# EAGLE board Titan (EAGLE 9.6.2)
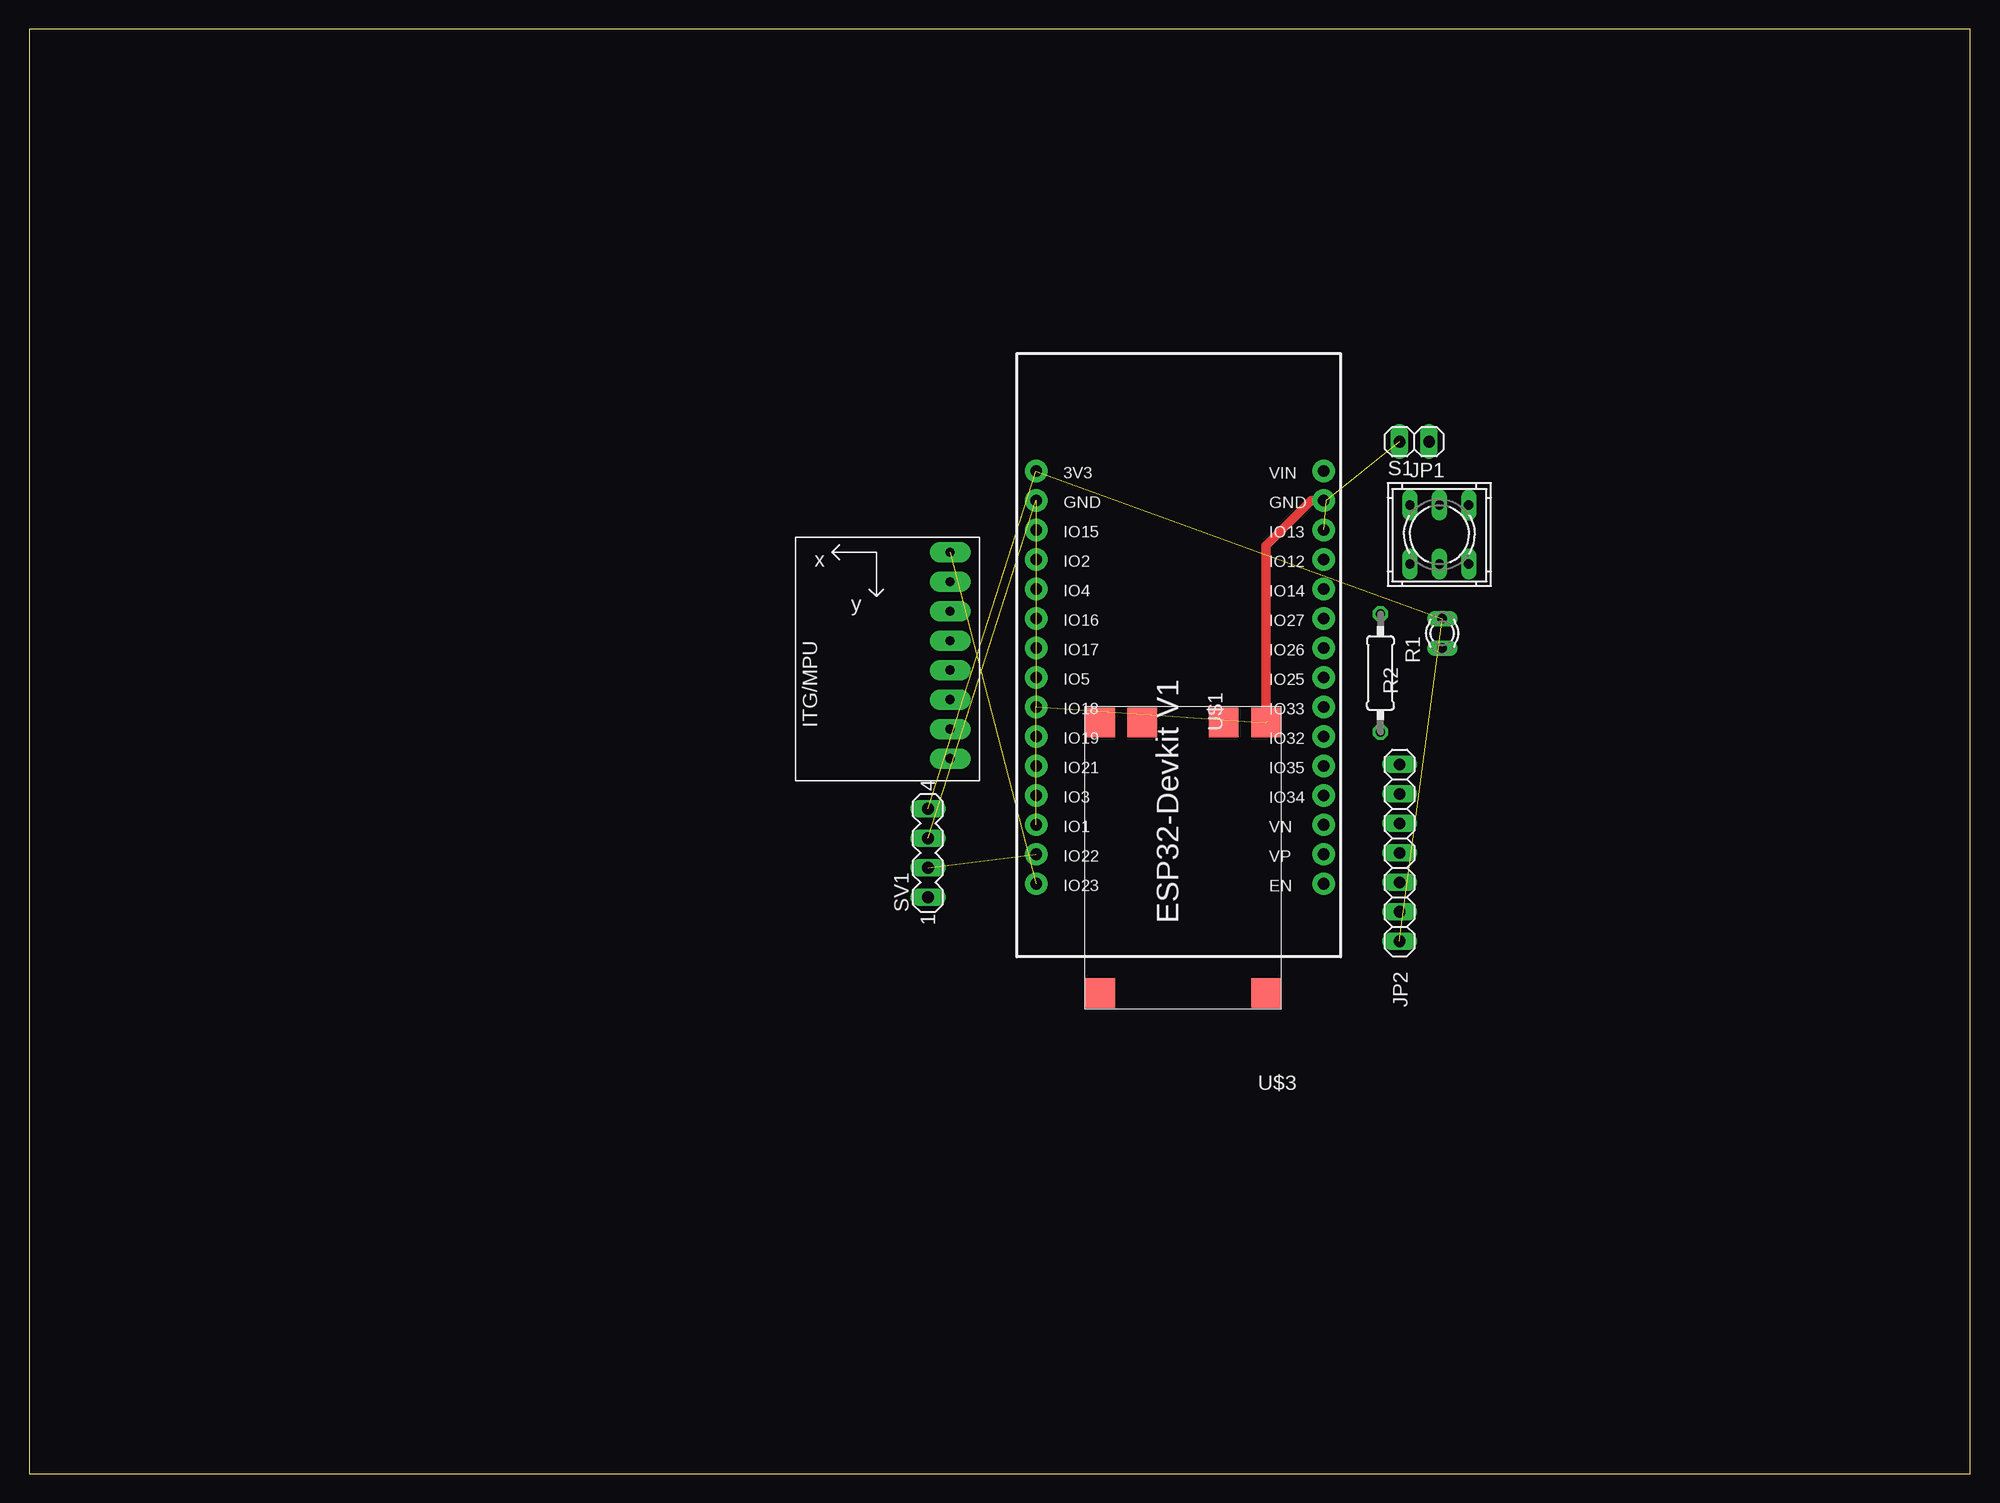
[diagram p0: board, top side]
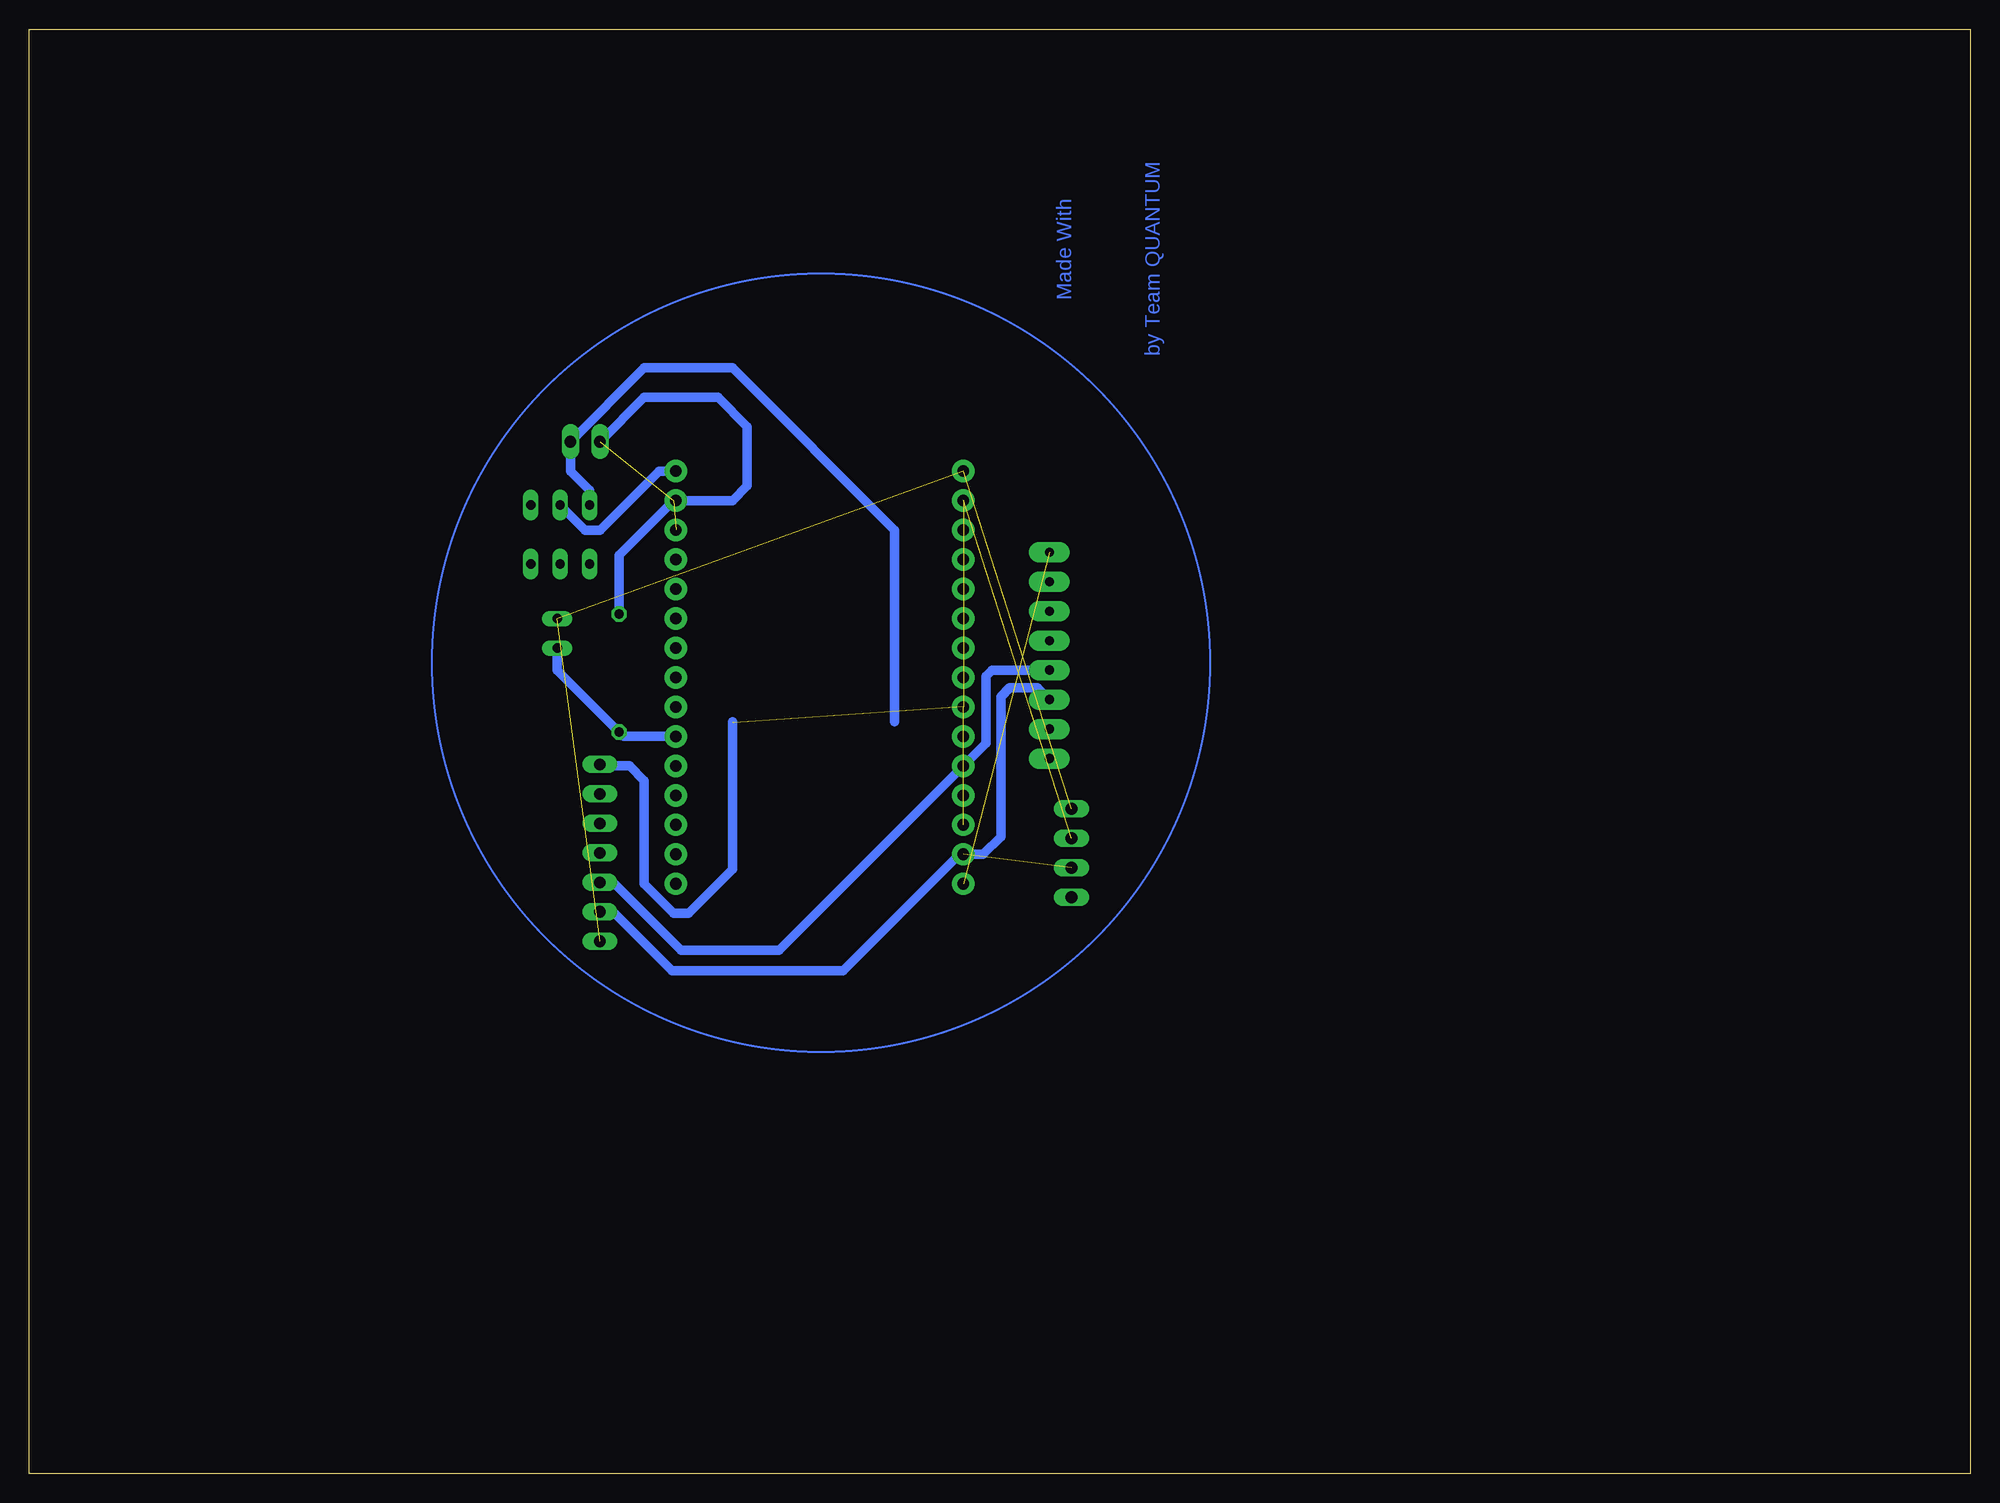
[diagram p1: board, bottom side, seen from below]

Size 167.31 x 124.45 mm. Coordinates in mm from the lower left corner, seen from the top.
Outline: 0,0 167.31,0 167.31,124.45 0,124.45 0,0
Copper layers (1*16): Top 0.035mm / dielectric 1.5mm / Bottom 0.035mm
Design rules "default": minimum track width 6mil, minimum drill 0.35mm, track to track 6mil, track to pad 6mil, pad to pad 6mil, via to via 6mil, smd to smd 6mil, copper to edge 40mil, drill to drill 6mil, minimum pad ring 10mil, minimum via ring 8mil, stop-mask expansion 4mil, vias tented up to drill 0mil, thermal gap 10mil

## Footprints (pad centres in the part's own frame; a part is rotated, then mirrored left to right if it is on the bottom)
1X02 = drill 1.016 long: 1 -1.27,0; 2 1.27,0
1X07 = drill 1.016 long: 1 -7.62,0; 2 -5.08,0; 3 -2.54,0; 4 0,0; 5 2.54,0; 6 5.08,0; 7 7.62,0
P640 = drill 0.813 long: 1 -1.27,0; 2 1.27,0
0207/10 = drill 0.813 octagon: 1 -5.08,0; 2 5.08,0
9077-2 = drill 0.813 long: 1 -2.54,2.54; 2 0,2.54; 3 2.54,2.54; 4 -2.54,-2.54; 5 0,-2.54; 6 2.54,-2.54
MA04-1 = drill 1.016 long: 1 -3.81,0; 2 -1.27,0; 3 1.27,0; 4 3.81,0
GY-521 = drill 0.8 pad 1.778 long: ADO -8.89,-6.35; GND -8.89,6.35; INT -8.89,-8.89; SCL -8.89,3.81; SDA -8.89,1.27; VCC -8.89,8.89; XCL -8.89,-3.81; XDA -8.89,-1.27
ESP32-DEVKITV1 = drill 1 pad 1.93: 1 -22.87,-13.54; 2 -20.33,-13.54; 3 -17.79,-13.54; 4 -15.25,-13.54; 5 -12.71,-13.54; 6 -10.17,-13.54; 7 -7.63,-13.54; 8 -5.09,-13.54; 9 -2.55,-13.54; 10 -0.01,-13.54; 11 2.53,-13.54; 12 5.07,-13.54; 13 7.61,-13.54; 14 10.15,-13.54; 15 12.69,-13.54; 16 12.69,11.23; 17 10.15,11.23; 18 7.61,11.23; 19 5.07,11.23; 20 2.53,11.23; 21 -0.01,11.23; 22 -2.55,11.23; 23 -5.09,11.23; 24 -7.63,11.23; 25 -10.17,11.23; 26 -12.71,11.23; 27 -15.25,11.23; 28 -17.79,11.23; 29 -20.33,11.23; 30 -22.87,11.23
TP4056 = smd 2.54 x 2.54: B+ 12,1.35; B- 5,1.35; IN+ 15.65,24.65; IN- 1.35,24.65; OUT+ 15.65,1.35; OUT- 1.35,1.35

## Placement (x,y rotation side)
JP1  [1X02]  119.38,88.9 180 top
JP2  [1X07]  118.11,53.47 90 top
R1  [P640]  121.79,72.39 90 top
R2  [0207/10]  116.46,68.96 270 top
S1  9077-2  [9077-2]  121.54,80.9 0 top
SV1  [MA04-1]  77.47,53.47 90 top
U1  GY-521MPU6050  [GY-521]  70.48,70.48 180 top
U$1  ESP32DEVKITV1  [ESP32-DEVKITV1]  100.33,63.5 270 top
U$3  TP4056  [TP4056]  107.95,66.04 180 top

## Library data of the parts
JP1 JP2 = pinhead
R1 = ptc-ntc; OC_FARNELL: unknown; OC_NEWARK: unknown
R2 = rcl; SPICEPREFIX: R
S1 = switch-misc
SV1 = con-lstb; OC_FARNELL: unknown; OC_NEWARK: unknown
U1 = gy-521
U$1 = ESP32-DEVKITV1
U$3 = 32teeth - TP4056 Module

## Nets
GND: JP2.7 R2.1 SV1.3 U$1.2 U$1.3 U$1.4 U$1.5 U$1.6 U$1.7 U$1.8 U$1.9 U$1.10 U$1.12 U$1.13 U$1.28 U$3.OUT-
N$1: U1.INT U$1.15
N$6: JP1.1 S1.1
N$9: R1.1 R2.2 U$1.21
N$11: S1.2 U$1.30
S$1: SV1.1
SCL: JP2.2 SV1.2 U1.SCL U$1.14
SDA: JP2.3 U$1.11
VCC: JP2.1 R1.2 SV1.4 U$1.1

## Tracks (layer width: path | path; a pad name or v marks a point on that pad's centre or on a via)
GND  (15 unrouted)
  Top 0.813: U$3.OUT- 106.6,79.93 110.49,83.82 111.76,83.82
  Bottom 0.813: 118.11,88.9 114.3,92.71 107.95,92.71 105.41,90.17 105.41,85.09 106.68,83.82 111.76,83.82 116.46,79.12 R2.1 | JP2.7 117.98,60.96 115.57,60.96 114.3,59.69 114.3,50.8 111.76,48.26 110.49,48.26 106.68,52.07 106.68,64.77
N$1  (1 unrouted)
N$6
  Bottom 0.813: S1.1 119,84.71 120.65,86.36 JP1.1 114.3,95.25 106.68,95.25 92.71,81.28 92.71,64.77
N$9
  Bottom 0.813: R1.1 121.79,69.22 R2.2 116.09,63.51 U$1.21
N$11
  Bottom 0.813: U$1.30 113.02,86.37 118.11,81.28 119.38,81.28 S1.2
SCL  (1 unrouted)
  Bottom 0.813: JP2.2 116.97,48.39 111.89,43.31 97.16,43.31 87.11,53.35 U$1.14 85.08,53.35 83.57,54.86 83.57,66.93 82.8,67.69 80.39,67.69 U1.SCL
SDA
  Bottom 0.813: U$1.11 102.67,45.08 111.12,45.08 116.97,50.93 JP2.3 | U$1.11 | U$1.11 84.84,62.92 84.84,68.71 84.33,69.22 79.38,69.22 79.12,69.47
VCC  (3 unrouted)
(copper drawn outside any net)
  shapes: Bottom circle x1

## Text on the board
Bottom: by Team QUANTUM | Made With 🖤